# Altium PCB bug-brain__A.PcbDoc (part 2 of 2)
Units mm, origin at the board's own origin, x right, y up, seen from the top; angles counter-clockwise.
Board outline 50.8 x 50.8 mm, 6 copper layers (Top Layer, GND1, IN1, IN2, GND2, Bottom Layer), stack 2.491 mm thick; 50 components, 73 nets, 290 pads, 119 vias.
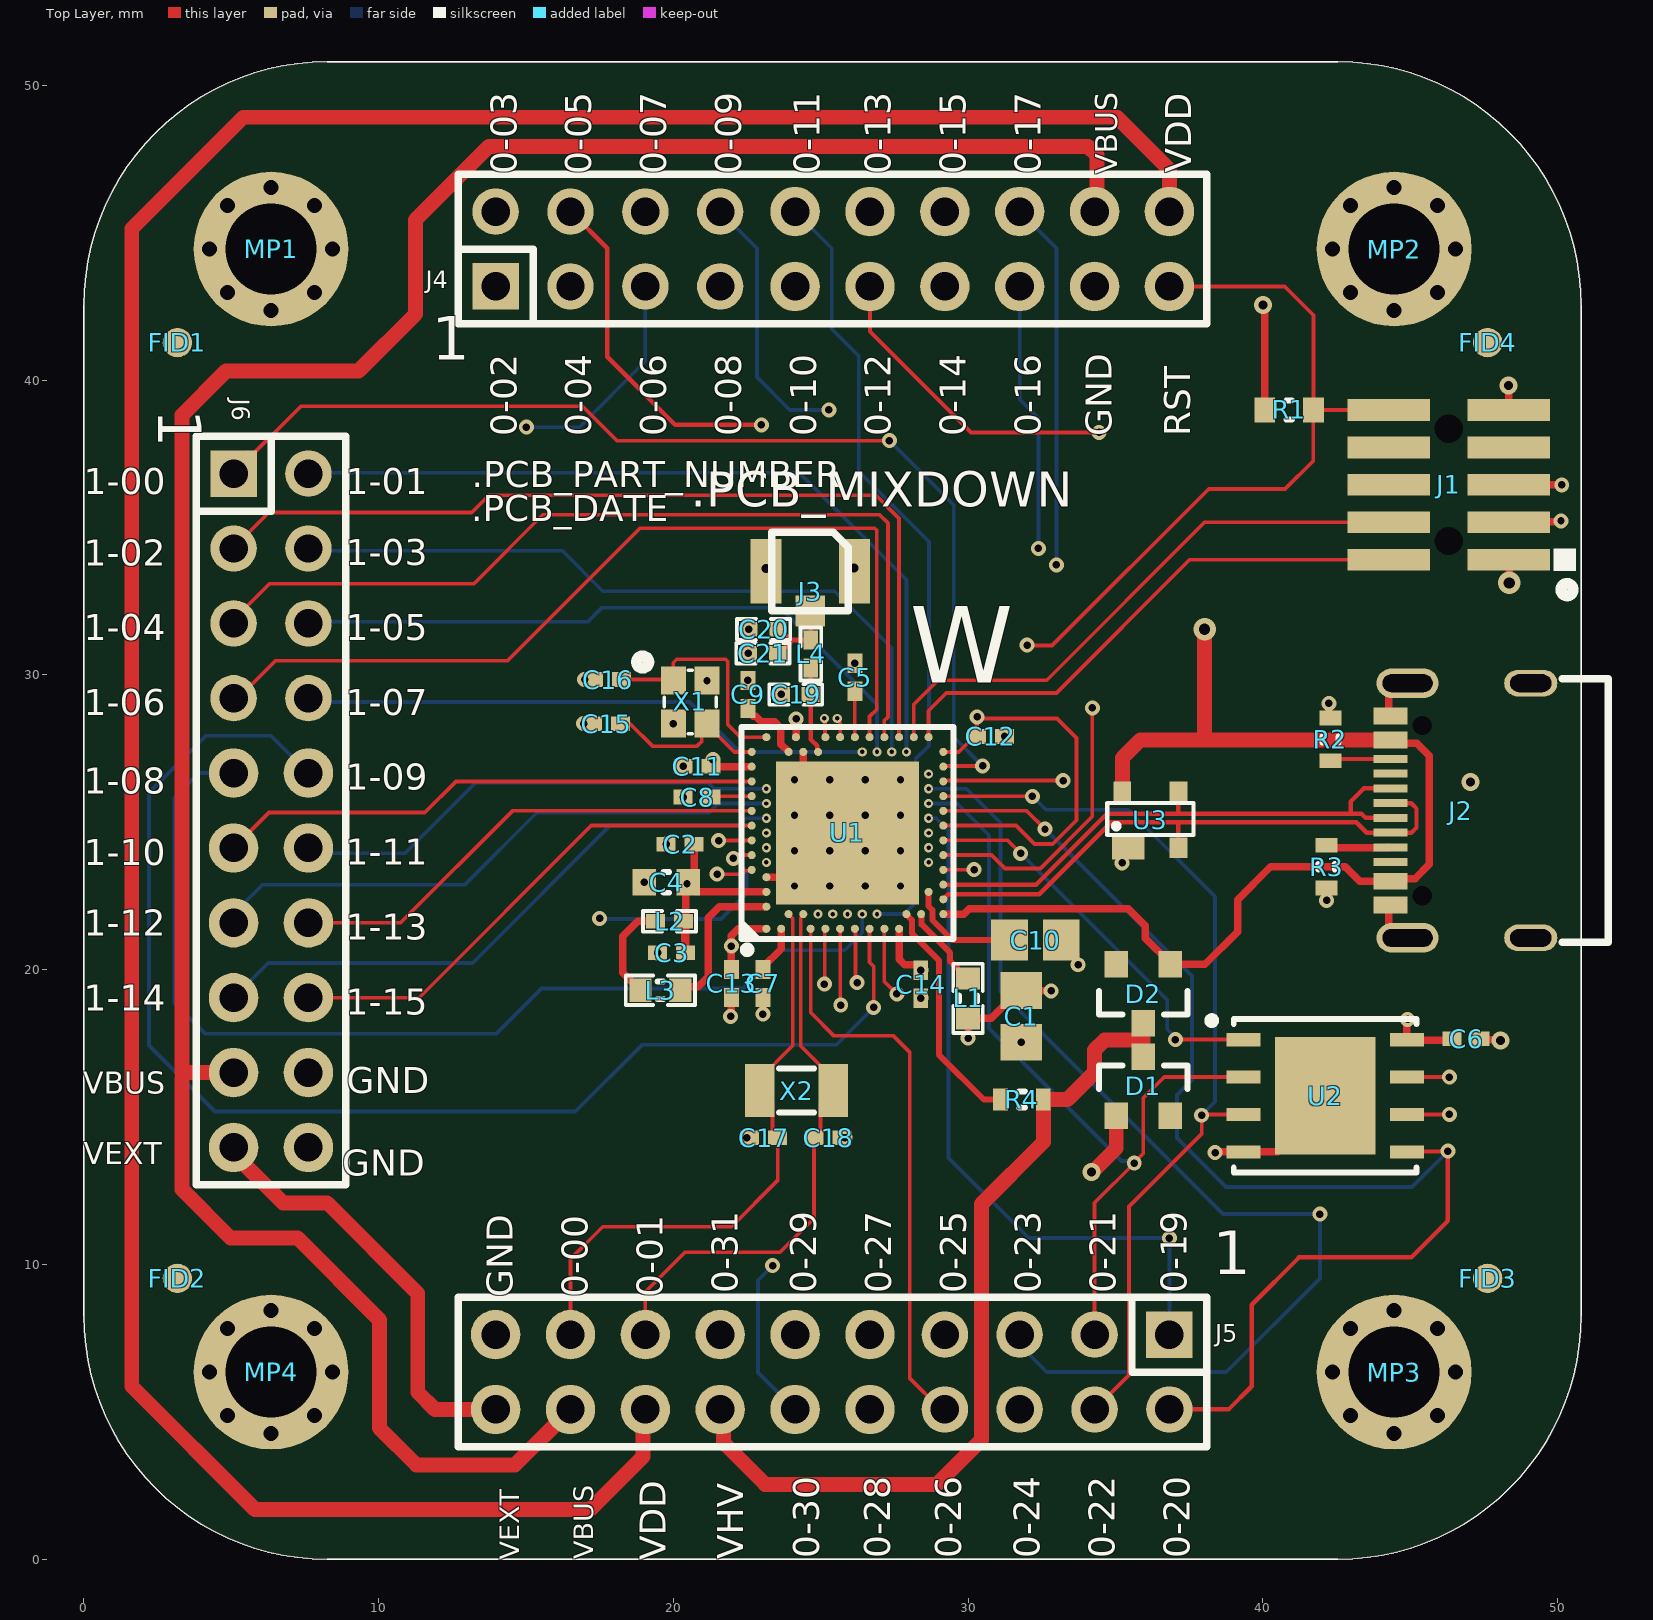
[diagram p0: Top Layer view]

## Silkscreen, mask and mechanical layers (free items; w line width, h text height) (continued)
Top Overlay: (continued)
  text "GND" at 14.864,8.895 h1.52 r90
  text "0-00" at 17.399,8.895 h1.52 r90
  text "0-01" at 19.939,8.895 h1.52 r90
  text "0-30" at 25.248,0.037 h1.52 r90
  text "0-28" at 27.661,0.036 h1.52 r90
  text "0-26" at 30.074,0.037 h1.52 r90
  text "0-24" at 32.741,0.037 h1.52 r90
  text "0-22" at 35.281,0.037 h1.52 r90
  text "0-20" at 37.821,0.037 h1.52 r90
  text "VBUS" at 17.501,0 h1.14 r90
  text "VHV" at 22.682,-0.001 h1.52 r90
  text "VEXT" at 14.986,-0.025 h1.14 r90
  text "VDD" at 20.041,-0.03 h1.52 r90
Bottom Overlay:
  text "W" at 38.186,20.211 h10.79
  text ".PCB_PART_NUMBER" at 37.763,15.207 h4.44
  text ".PCB_MIXDOWN" at 16.929,11.528 h9.53
  text ".PCB_DATE" at 38.296,10.737 h4.44
[8] Board Outline:
  lines w0.025: 13.208,6.223 50.038,6.223 50.038,44.323 13.208,44.323 13.208,6.223

## Text inside footprints (layer, text, board x,y; h text height)
J4: Top Overlay "1" at 11.811,40.208 h2.54
J5: Top Overlay "1" at 38.303,9.169 h2.54
J6: Top Overlay "1" at 2.032,39.014 h2.54 r270